# Altium PCB Ahmad_reza_shabani.PcbDoc
Units mm, origin at the board's own origin, x right, y up, seen from the top; angles counter-clockwise.
Board outline 109.35 x 65.66 mm, 2 copper layers (Top Layer, Bottom Layer); 28 components, 24 nets, 118 pads, 25 vias.
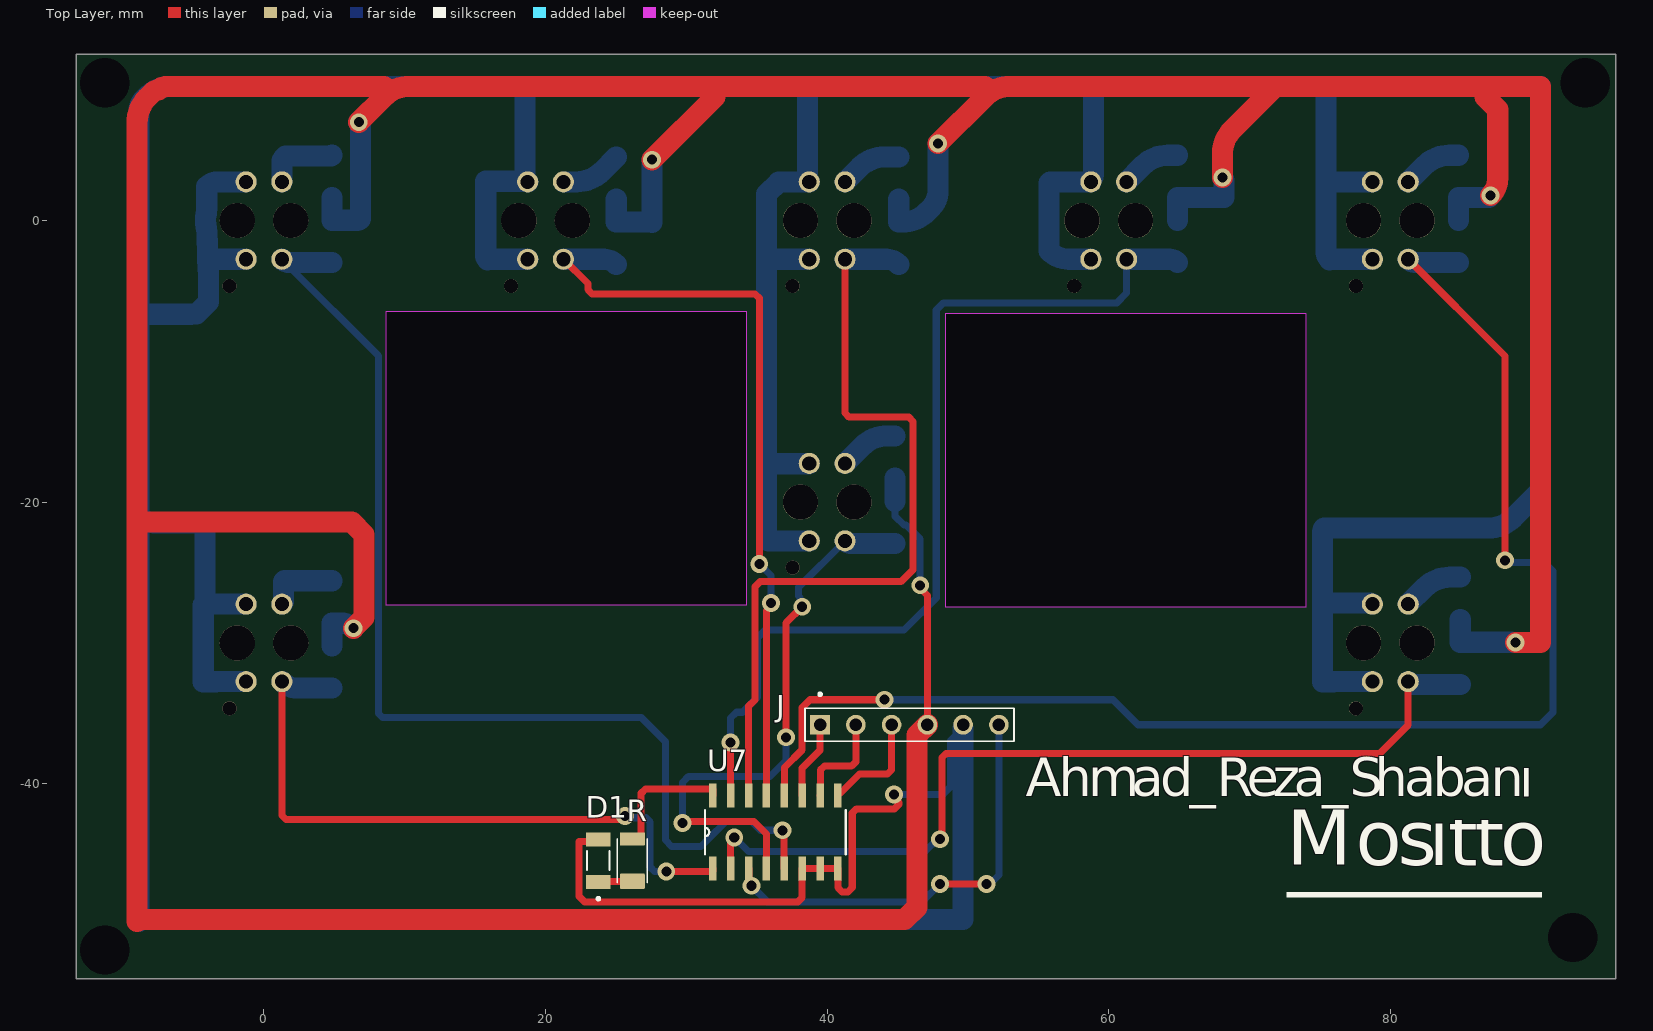
[diagram p0: Top Layer view]
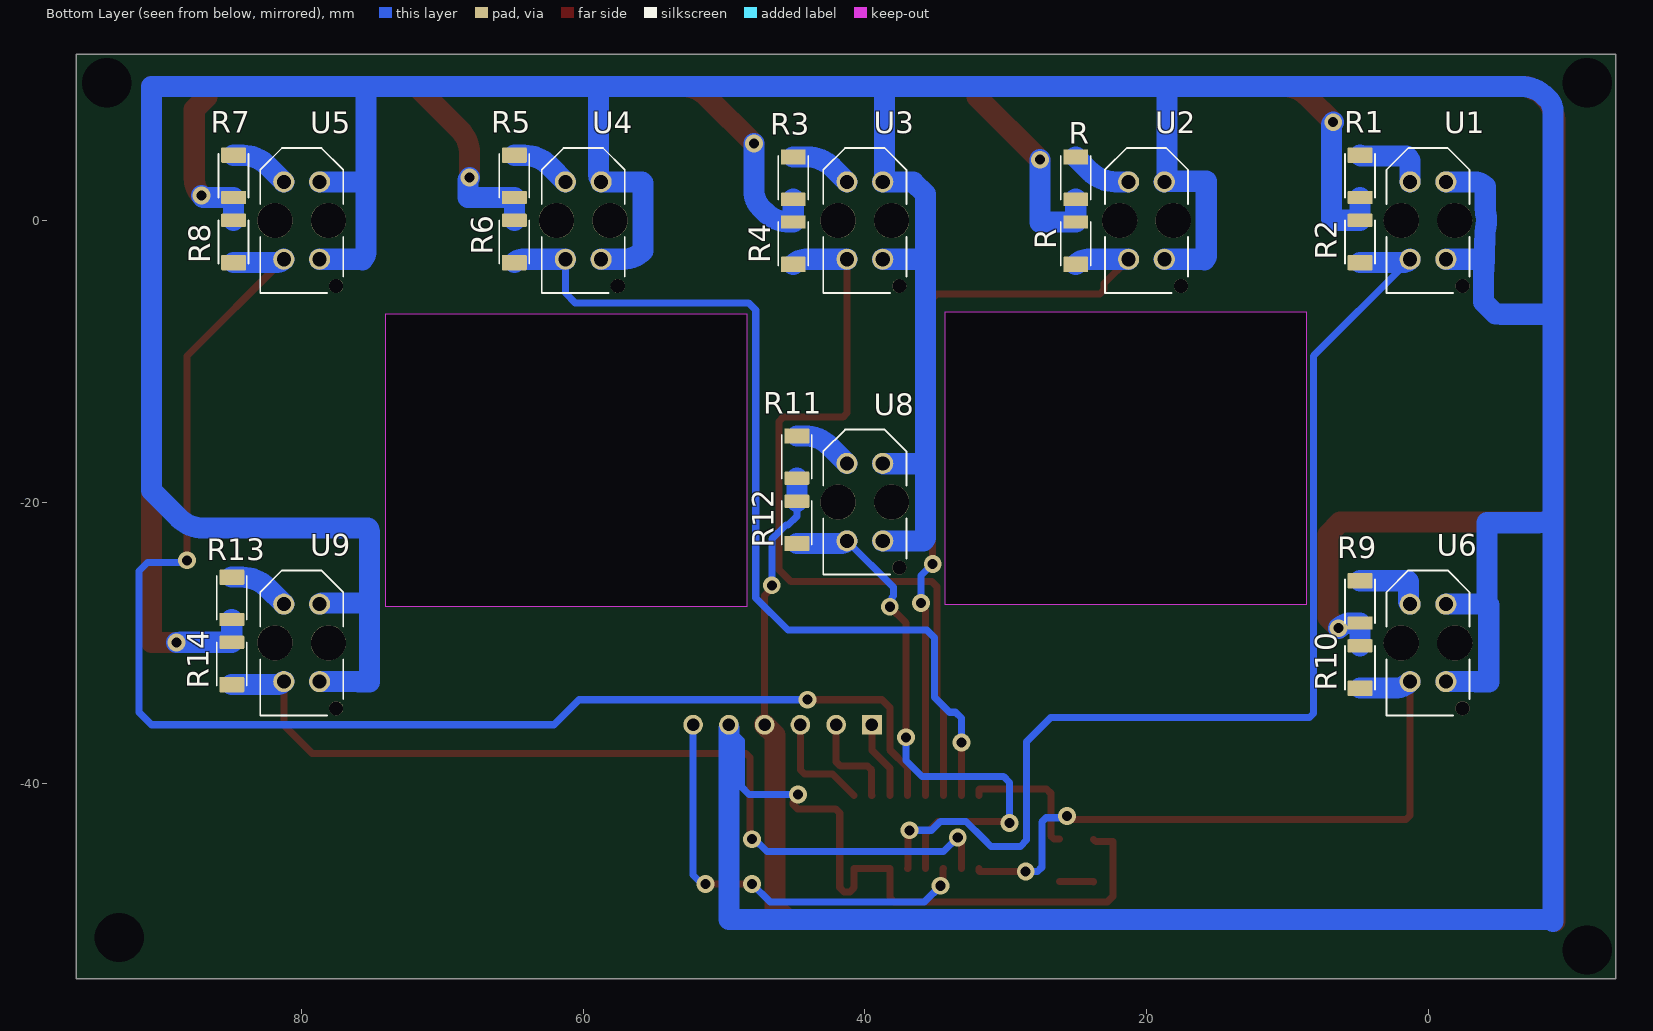
[diagram p1: Bottom Layer view, seen from below]
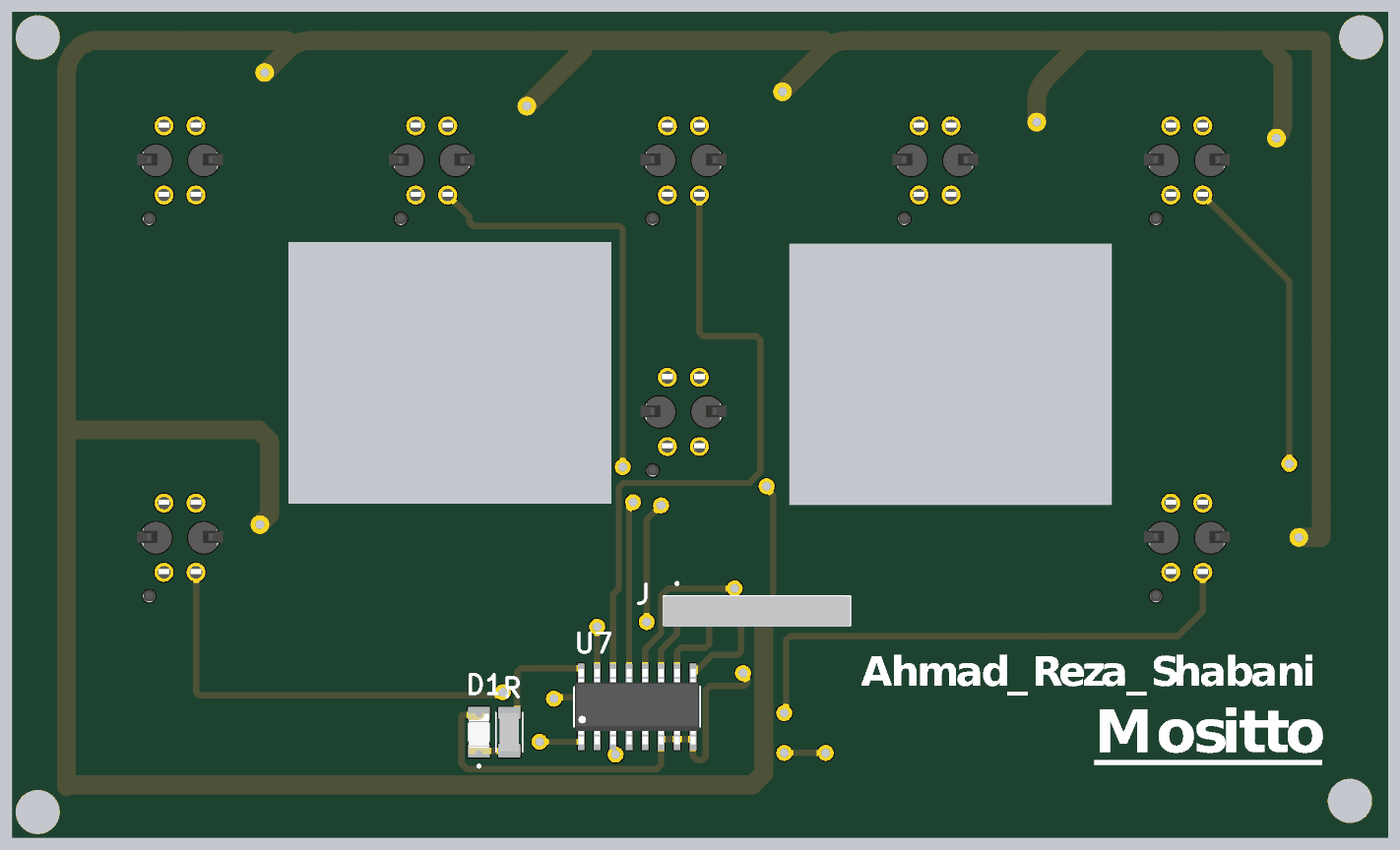
[diagram p2: 3D render of the assembled board from above, using the file's embedded part models]
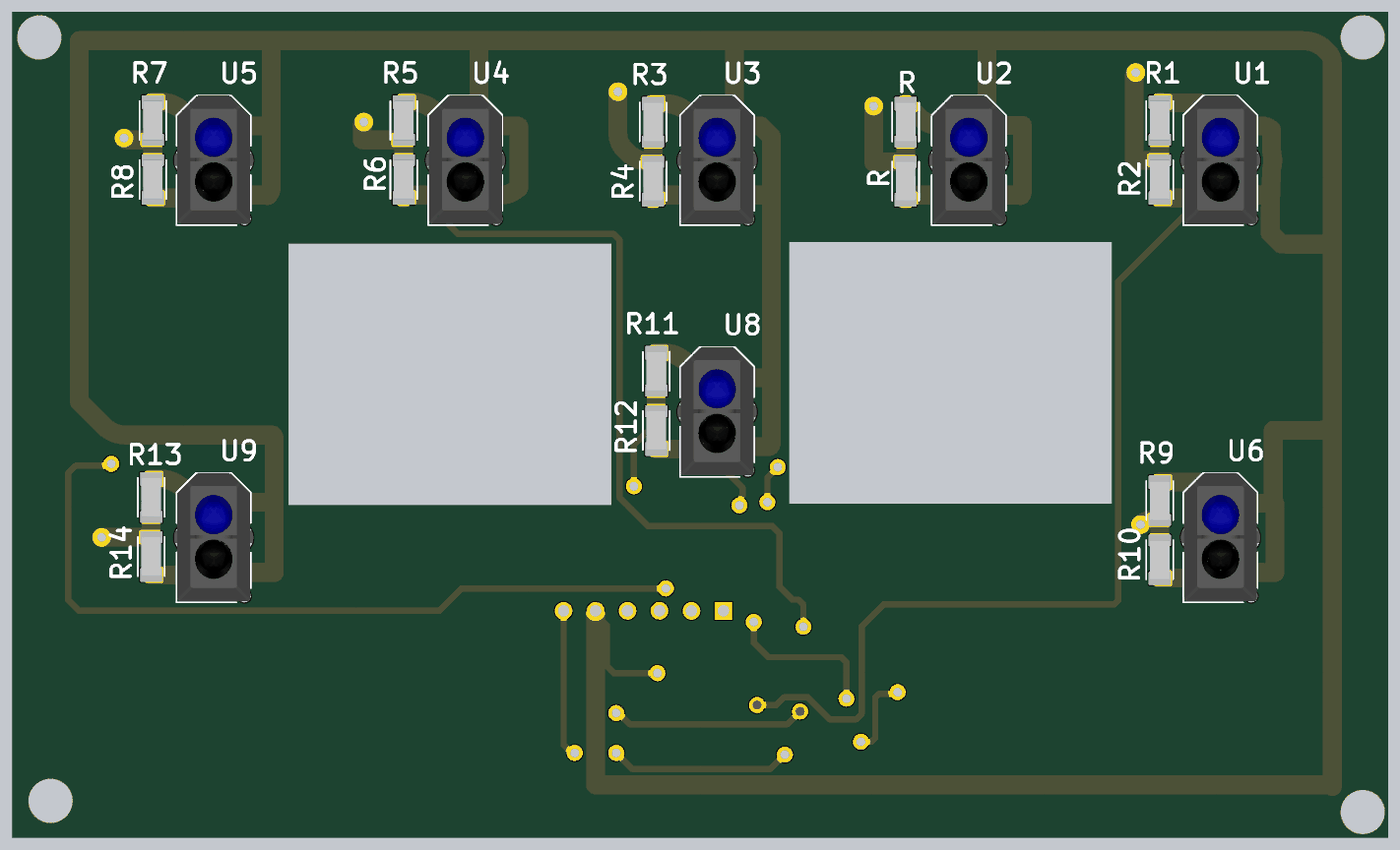
[diagram p3: 3D render of the assembled board from below, using the file's embedded part models]

## Layer stack, top to bottom
Top Solder: solder mask 0.0102, Solder Resist, Dk 3.5
Top Layer: signal copper 0.0356
Dielectric 1: dielectric 0.32, FR-4, Dk 4.8
Bottom Layer: signal copper 0.0356
Bottom Solder: solder mask 0.0102, Solder Resist, Dk 3.5

## Board outline
-13.335,11.811 96.012,11.811 96.012,-53.848 -13.335,-53.848
cut-out: 74.041,-27.432 74.041,-6.604 48.387,-6.604 48.387,-27.432
cut-out: 34.29,-27.305 34.29,-6.477 8.636,-6.477 8.636,-27.305

## Design rules (kind name [scope] priority, off if disabled: settings)
Clearance [All] p1: gap=0.254 ignorepadtopadclearanceinfootprint=FALSE except(0: Arc-Hole Track-Hole SMDPad-Hole THPad-Hole Via-Hole Fill-Hole Poly-Hole Region-Hole Text-Hole)
PolygonConnect [All] p1: connectstyle=Relief reliefconductorwidth=0.254 reliefentries=4 polygonreliefangle="90 Angle" airgapwidth=0.254
RoutingVias [All] p1: holewidth=0.711 width=1.27 viastyle="Through Hole" minholewidth=0.711 minwidth=1.27 maxholewidth=0.711 maxwidth=1.27
SolderMaskExpansion [All] p1: expansion=0.102 istentingtop=FALSE
Width [All] p1: maxlimit=1.5 minlimit=0.5 preferedwidth=1 minimp=50.000000 maximp=50.000000 favimp=50.000000
30 further rules are at their usual default settings.

## Classes and differential pairs
component class Sheet4: D1 J R R1 R2 R3 R4 R5 R6 R7 R8 R9 R10 R11 R12 R13 R14 U1 U2 U3 U4 U5 U6 U7 U8 U9

## Components (designator, comment, footprint, x,y, rotation, side; value= is the part's Value field where it differs from the comment)
D1 "LHN974_RED_LED_1206" LEDC3216X120N 23.749,-45.466 r90 top
J "103321-6" TE_103321-6 45.847,-35.814 r0 top
R "2-1879462-9" RESC3115X65N 25.019,-1.651 r90 bottom
R "2-1879462-9" RESC3115X65N 25.019,3.048 r270 bottom
R "2-1879462-9" RESC3115X65N 26.162,-45.466 r90 top
R1 "2-1879462-9" RESC3115X65N 4.826,3.175 r270 bottom
R2 "2-1879462-9" RESC3115X65N 4.826,-1.524 r90 bottom
R3 "2-1879462-9" RESC3115X65N 45.085,3.048 r270 bottom
R4 "2-1879462-9" RESC3115X65N 45.085,-1.651 r90 bottom
R5 "2-1879462-9" RESC3115X65N 64.897,3.175 r270 bottom
R6 "2-1879462-9" RESC3115X65N 64.897,-1.524 r90 bottom
R7 "2-1879462-9" RESC3115X65N 84.836,3.175 r270 bottom
R8 "2-1879462-9" RESC3115X65N 84.836,-1.524 r90 bottom
R9 "2-1879462-9" RESC3115X65N 4.826,-27.051 r270 bottom
R10 "2-1879462-9" RESC3115X65N 4.826,-31.75 r90 bottom
R11 "2-1879462-9" RESC3115X65N 44.831,-16.764 r270 bottom
R12 "2-1879462-9" RESC3115X65N 44.831,-21.479 r90 bottom
R13 "2-1879462-9" RESC3115X65N 84.963,-26.797 r270 bottom
R14 "2-1879462-9" RESC3115X65N 84.963,-31.496 r90 bottom
U1 "TCRT5000" OPTO_TCRT5000 0,0 r90 bottom
U2 "TCRT5000" OPTO_TCRT5000 20,0 r90 bottom
U3 "TCRT5000" OPTO_TCRT5000 40,0 r90 bottom
U4 "TCRT5000" OPTO_TCRT5000 60,0 r90 bottom
U5 "TCRT5000" OPTO_TCRT5000 80,0 r90 bottom
U6 "TCRT5000" OPTO_TCRT5000 0,-30 r90 bottom
U7 "74HC4051D" SOIC127P600X175-16N 36.322,-43.434 r90 top
U8 "TCRT5000" OPTO_TCRT5000 40,-20 r90 bottom
U9 "TCRT5000" OPTO_TCRT5000 80,-30 r90 bottom

## Footprints (in the part's own frame and the unit in brackets; to place one, negate y for a bottom-side part, rotate by r counter-clockwise, add the part's x,y. Pads: shape width x height; smd on the part's side, far side on the other; paste and mask are expansions set on the pad)
LEDC3216X120N [mm]
  rect 1.01x1.73 smd: NEG(1.51,0) POS(-1.51,0)
  silkscreen extent -2.8,-0.8 0.68,0.8, body extent -1.73,-0.8 1.47,0.8, height 1.2
OPTO_TCRT5000 [mm]
  round 1.5 hole 1: A(2.75,1.27) CATH(2.75,-1.27) COLL(-2.75,1.27) E(-2.75,-1.27)
  round 1 hole 1 unplated: ""(-4.65,-2.45)
  round 2.5 hole 2.5 unplated: ""(0,-1.9) ""(0,1.9)
  silkscreen extent -5.15,-2.95 5.15,2.95, body extent -5.04,-3.4 5.16,3.4, height 7.2
RESC3115X65N [mm]
  rrect14% 1.09x1.77 smd: 1(-1.465,0)
  rrect14% 0.94x1.77 smd: 2(1.54,0)
  silkscreen extent -1.55,-1.06 1.55,1.06, body extent -1.55,-0.77 1.55,0.77, height 0.56
SOIC127P600X175-16N [mil]
  rect 67x21 smd: 1(-102,175) 2(-102,125) 3(-102,75) 4(-102,25) 5(-102,-25) 6(-102,-75) 7(-102,-125) 8(-102,-175) 9(102,-175) 10(102,-125) 11(102,-75) 12(102,-25) 13(102,25) 14(102,75) 15(102,125) 16(102,175)
  silkscreen extent -62,-197 62,197, body extent -118,-195 118,195, height 69
TE_103321-6 [mm]
  rect 1.398x1.398 hole 0.89: 1(-6.35,0)
  round 1.398 hole 0.89: 2(-3.81,0) 3(-1.27,0) 4(1.27,0) 5(3.81,0) 6(6.35,0)
  silkscreen extent -7.42,-1.17 7.42,2.27, body extent -7.42,-1.17 7.42,1.17, height 10.58

## Part data
D1: "2.6 V Red LED SMD", Package=None, Availability="Not in stock", Check_prices=https://www.snapeda.com/parts/LHN974%20RED%20LED%201206/Osram/view-part/7899607/?ref=eda, MF=Osram, MP="LHN974 RED LED 1206", Price=None, SnapEDA_Link=https://www.snapeda.com/parts/LHN974%20RED%20LED%201206/Osram/view-part/7899607/?ref=snap
J: "Pin 06 MODII HDR SRST B / A .100CL 6 POS", Package=None, Availability=Unavailable, MF="TE Connectivity", Mouser-Purchase-URL=https://snapeda.com/shop?store=Mouser&id=4238467, MP=103321-6, Price=None, SnapEDA_Link=https://www.snapeda.com/parts/103321-6/TE%20Connectivity/view-part/4238467/?ref=snap
R R R R1 R2 R3 R4 R5 R6 R7 R8 R9 R10 R11 R12 R13 R14: "RES 0.24 OHM 1% 1/4W 1206", Package=1206, Power_Rating=".25 W", Resistance=24, Tolerance=1%, Availability=Unavailable, EU_RoHS_Compliance="Compliant with Exemptions", MF="TE Connectivity", MP=2-1879462-9, Price=None, SnapEDA_Link=https://www.snapeda.com/parts/2-1879462-9/TE%20Connectivity/view-part/2213899/?ref=snap
U1 U2 U3 U4 U5 U6 U8 U9: "950 nm 60 mA Through Hole Reflective Optical Sensor with Transistor Output", Package=None, Availability=Unavailable, MP=TCRT5000, Price=None
U7: "1 Circuit IC Switch 8:1 130Ohm 16-SOIC", Package="SOIC-16 Toshiba", Availability="In Stock", Check_prices=https://www.snapeda.com/parts/74HC4051D/Toshiba/view-part/?ref=eda, MF=Toshiba, MP=74HC4051D, Price=None, Purchase-URL=https://pricing.snapeda.com/search/part/74HC4051D/?ref=eda, SnapEDA_Link=https://www.snapeda.com/parts/74HC4051D/Toshiba/view-part/?ref=snap

## Free pads (board coordinates)
  round 1.524 hole 3.5: 5(-11.303,-51.816) 5(-11.303,9.779) 5(92.964,-50.927) 5(93.853,9.779)

## Via types
v1: diameter 1.27, hole 0.711, Top Layer to Bottom Layer, 25 vias

## Nets (pads, with @x,y where several pads share a name; then routed paths per layer and width w, separated by ;. In a path a pad name is that pad's centre, name@x,y a point inside that pad or via, vN(x,y) a via of type N, cw(c..) or ccw(c..) an arc to the next point about the centre after c; other vN are vias at no path point)
+5: J.4 R1.2 R2.2 R3.2 R4.2 R5.2 R6.2 R7.2 R8.2 R9.2 R10.2 R11.2 R12.2 R13.2 R14.2 R.2@25.019,1.508 R.2@25.019,-0.111 | length 386.9
  Top Layer w0.5: v1(46.609,-25.908) 46.609,-26.116 47.117,-26.624 J.4
  Top Layer w1.5: v1(6.35,-28.956) 7.112,-28.194 7.112,-22.296 6.233,-21.418 -9.017,-21.418 ; v1(6.731,6.985) 8.527,8.781 cw(c10.323,6.985) 10.323,9.525 32.022,9.525 33.818,9.525 51.199,9.525 ; 8.527,9.525 -6.88,9.525 ccw(c-6.88,8.658) -7.493,9.271 ccw(c-7.493,8.658) -7.927,9.091 -8.273,8.745 ccw(c-6.477,6.949) -9.017,6.949 -9.017,-21.418 ; v1(27.559,4.318) 32.022,8.781 ; J.4 46.379,-36.552 46.379,-48.778 45.5,-49.657 -8.71,-49.657 ccw(c-8.71,-50.091) -9.017,-49.784 -9.017,-49.657 -9.017,-21.418 ; v1(47.879,5.461) 51.199,8.781 cw(c52.995,6.985) 52.995,9.525 71.837,9.525 ; v1(68.072,3.048) 68.072,4.708 cw(c70.612,4.708) 68.816,6.504 71.837,9.525 ; 86.723,8.781 87.63,7.874 87.63,3.004 cw(c85.896,3.004) v1(87.122,1.778) ; v1(88.9,-29.972) 90.678,-29.972 90.678,9.525 86.723,9.525 84.927,9.525 71.837,9.525
  Bottom Layer w0.5: R12.2 44.831,-21.006 45.445,-21.62 45.606,-21.62 46.609,-22.624 v1(46.609,-25.908)
  Bottom Layer w1.5: R10.2 R9.2 5.469,-28.591 cw(c5.469,-29.837) v1(6.35,-28.956) ; R1.2 R2.2 6.59,0.016 ccw(c6.59,0.395) 6.858,0.127 6.858,6.678 ccw(c6.424,6.678) v1(6.731,6.985) ; R.2@25.019,1.508 25.019,-0.111 27.52,-0.111 cw(c27.52,-0.166) 27.559,-0.127 v1(27.559,4.318) ; R12.2 R11.2 ; R3.2 R4.2 45.319,-0.111 ccw(c45.319,2.429) 47.115,0.633 47.371,0.889 ccw(c46.145,2.115) 47.879,2.115 v1(47.879,5.461) ; R6.2 R5.2 68.16,1.635 ccw(c68.16,1.69) 68.199,1.651 68.199,2.741 ccw(c67.765,2.741) v1(68.072,3.048) ; R8.2 R7.2 86.956,1.635 ccw(c86.956,1.69) 86.995,1.651 v1(87.122,1.778) ; R13.2 R14.2 88.607,-29.956 cw(c88.607,-30.011) 88.646,-29.972 v1(88.9,-29.972)
"Analog _A0": R.1@25.019,-3.116 U2.COLL U7.13 | length 55
  Top Layer w0.5: U2.COLL 23.006,-4.486 23.006,-4.914 23.299,-5.207 34.886,-5.207 35.179,-5.5 v1(35.179,-24.384) ; U7.13 35.687,-27.703 36.003,-27.386 v1(36.003,-27.178)
  Bottom Layer w0.5: v1(35.179,-24.384) 36.003,-25.208 v1(36.003,-27.178)
  Bottom Layer w1.5: U2.COLL 24.135,-2.75 cw(c24.135,-4) R.1@25.019,-3.116
"Analog _A1": R4.1 U3.COLL U7.14 | length 57.2
  Top Layer w0.5: U7.14 34.417,-34.495 34.864,-34.047 34.864,-26.008 35.218,-25.654 45.252,-25.654 46.101,-24.805 46.101,-14.263 45.808,-13.97 41.563,-13.97 41.27,-13.677 U3.COLL
  Bottom Layer w1.5: U3.COLL 44.201,-2.75 cw(c44.201,-4) R4.1
"Analog _A2": R6.1 U4.COLL U7.15 | length 66.7
  Top Layer w0.5: U7.15 v1(33.147,-37.084)
  Bottom Layer w0.5: v1(33.147,-37.084) 33.147,-35.345 33.567,-34.925 33.987,-34.925 35.049,-33.863 35.049,-29.633 35.599,-29.083 45.466,-29.083 47.748,-26.801 47.748,-6.354 48.26,-5.842 60.579,-5.842 61.27,-5.151 U4.COLL
  Bottom Layer w1.5: U4.COLL 64.32,-2.75 cw(c64.32,-3.566) R6.1
"Analog _A3": R8.1 U5.COLL U7.12 | length 103.1
  Top Layer w0.5: U7.12 36.957,-38.862 38.227,-37.592 38.227,-34.583 38.774,-34.036 v1(44.069,-34.036) ; U5.COLL 88.138,-9.618 v1(88.138,-24.13)
  Bottom Layer w0.5: v1(44.069,-34.036) 60.313,-34.036 62.091,-35.814 90.678,-35.814 91.567,-34.925 91.567,-24.892 90.952,-24.277 88.285,-24.277 v1(88.138,-24.13)
  Bottom Layer w1.5: U5.COLL ccw(c81.847,-2.173) 81.847,-2.989 R8.1
"Analog _A4": R10.1 U6.COLL U7.1 | length 47.7
  Top Layer w0.5: U6.COLL 1.27,-42.252 1.563,-42.545 25.192,-42.545 25.446,-42.291 v1(25.654,-42.291) ; v1(28.575,-46.228) 31.86,-46.228 31.877,-46.211 U7.1
  Bottom Layer w0.5: v1(25.654,-42.291) 25.781,-42.418 27.139,-42.418 27.432,-42.711 27.432,-45.935 27.725,-46.228 v1(28.575,-46.228)
  Bottom Layer w1.5: U6.COLL ccw(c2.393,-31.627) 2.393,-33.215 R10.1
"Analog _A5": R2.1 U1.COLL U7.5 | length 79.2
  Top Layer w0.5: v1(36.83,-43.307) 36.94,-43.417 36.94,-46.008 U7.5
  Bottom Layer w0.5: U1.COLL 1.678,-3.158 8.128,-9.608 8.128,-35.013 8.421,-35.306 26.797,-35.306 28.512,-37.021 28.512,-44.006 28.956,-44.45 31.028,-44.45 31.566,-43.912 32.802,-42.676 34.64,-42.676 35.271,-43.307 v1(36.83,-43.307)
  Bottom Layer w1.5: U1.COLL ccw(c1.847,-2.173) 1.847,-2.989 R2.1
"Analog _A6": R14.1 U7.2 U9.COLL | length 64.5
  Top Layer w0.5: U7.2 33.147,-44.277 33.401,-44.023 v1(33.401,-43.815) ; v1(48.018,-43.942) 48.165,-43.795 48.165,-38.139 48.458,-37.846 79.248,-37.846 81.27,-35.824 U9.COLL
  Bottom Layer w0.5: v1(33.401,-43.815) 34.413,-44.827 46.944,-44.827 47.829,-43.942 v1(48.018,-43.942)
  Bottom Layer w1.5: U9.COLL ccw(c81.779,-32.241) 81.779,-32.961 R14.1
"Analog _A7": R12.1 U7.4 U8.COLL | length 40.9
  Top Layer w0.5: v1(29.718,-42.799) 29.841,-42.676 34.802,-42.676 35.687,-43.561 U7.4 ; v1(37.088,-36.703) 37.088,-28.571 v1(38.227,-27.432)
  Bottom Layer w0.5: v1(29.718,-42.799) 29.718,-39.917 30.138,-39.497 35.941,-39.497 37.088,-38.35 v1(37.088,-36.703) ; v1(38.227,-27.432) 38.08,-27.285 38.08,-26.777 37.973,-26.67 37.973,-26.047 U8.COLL
  Bottom Layer w1.5: U8.COLL ccw(c41.738,-22.282) 41.738,-22.944 R12.1
GND: D1.NEG J.5 U1.CATH U1.E U2.CATH U2.E U3.CATH U3.E U4.CATH U4.E U5.CATH U5.E U6.CATH U6.E U7.6 U7.7 U7.8 U8.CATH U8.E U9.CATH U9.E | length 480.6
  Top Layer w0.5: D1.NEG 23.597,-44.108 22.38,-44.108 22.38,-47.995 22.772,-48.387 37.934,-48.387 38.227,-48.094 U7.6 U7.7 U7.8 40.767,-47.387 41.06,-47.68 41.474,-47.68 41.783,-47.371 41.783,-42.076 42.076,-41.783 44.792,-41.783 45.085,-41.49 45.085,-41.32 44.74,-40.975 v1(44.74,-40.767)
  Bottom Layer w0.5: v1(44.74,-40.767) 48.221,-40.767 48.778,-40.21 48.778,-36.936 49.657,-36.057 J.5
  Bottom Layer w1.5: -3.954,-4.027 -3.954,-5.78 -4.804,-6.63 cw(c-5.197,-3.972) -5.193,-6.659 -8.89,-6.659 ; -3.953,-4.026 -3.953,-3.956 -3.954,-3.932 ; -3.954,-3.931 -3.993,-2.754 -3.995,-2.718 ; U6.E -3.39,-32.75 ccw(c-3.39,-32.805) -3.429,-32.766 -4.318,-32.766 -4.318,-27.305 cw(c-4.185,-27.438) -4.185,-27.25 ; U6.CATH -4.185,-27.25 ; U1.E -3.864,-2.75 cw(c-3.864,-2.467) -3.995,-2.718 ; U1.CATH -3.25,2.75 ccw(c-3.25,1.599) -4.064,2.413 -4.064,0.814 cw(c-5.564,0.817) -4.099,0.493 ccw(c-1.9,0) -4.109,0.45 ccw(c-1.9,0) -4.099,-0.493 ccw(c-1.9,0) -4.096,-0.508 cw(c-5.558,-0.845) -4.058,-0.797 -3.995,-2.718 ; U2.E 15.981,-2.75 ccw(c15.981,-2.9) 15.875,-2.794 cw(c16.182,-2.487) 15.748,-2.487 15.748,2.794 18.624,2.794 cw(c18.624,2.644) U2.CATH cw(c19.184,3.204) 18.542,3.204 18.542,9.525 ; U8.E 35.855,-22.75 cw(c35.855,-22.692) 35.814,-22.733 cw(c36.121,-22.426) 35.687,-22.426 35.687,-17.272 ; U8.CATH cw(c38.677,-17.197) 38.677,-17.272 35.687,-17.272 ; U3.E 35.973,-2.75 ccw(c36.663,-3.44) 35.687,-3.44 ; J.5@49.657,-36.057 49.657,-49.657 -8.583,-49.657 ccw(c-8.583,-50.091) -8.89,-49.784 -8.89,-21.034 ; U4.E 57.18,-2.75 cw(c57.18,-0.732) 55.753,-2.159 55.753,2.667 cw(c55.953,2.467) 55.953,2.75 U4.CATH 58.928,3.228 58.928,5.783 ; 58.928,5.933 58.928,9.525 ; 75.438,9.144 75.438,2.794 ; U9.E 75.985,-32.75 ccw(c75.985,-32.805) 75.946,-32.766 75.184,-32.766 75.184,-27.178 ; U9.CATH ccw(c78.556,-27.424) 78.556,-27.178 75.184,-27.178 ; U5.E 75.798,-2.75 ccw(c75.798,-2.9) 75.692,-2.794 cw(c76.305,-2.181) 75.438,-2.181 75.438,2.794 ; U5.CATH 75.544,2.75 cw(c75.544,2.9) 75.438,2.794 ; -8.89,-21.034 ccw(c-7.854,-19.998) -7.854,-21.463 -4.191,-21.463 -4.185,-21.469 -4.185,-27.25 ; -8.89,-21.034 -8.89,-6.659 ; -8.89,-6.659 -8.89,7.716 cw(c-7.589,7.716) -8.509,8.636 -8.364,8.781 cw(c-6.568,6.985) -6.568,9.525 18.542,9.525 ; 18.542,9.525 38.608,9.525 ; 35.687,-17.272 35.687,-3.44 ; 35.687,-3.44 35.687,1.871 36.566,2.75 U3.CATH cw(c39.025,3.045) 38.608,3.045 38.608,9.525 ; 38.608,9.525 58.928,9.525 ; 58.928,9.525 90.678,9.525 90.678,-19.177 88.755,-21.1 cw(c86.959,-19.304) 86.959,-21.844 75.311,-21.844 ccw(c75.618,-22.151) 75.184,-22.151 75.184,-27.178
NetD1_POS: D1.POS R.1@26.162,-46.931 | length 2.4
  Top Layer w0.5: D1.POS 23.771,-46.954 26.14,-46.954 R.1@26.162,-46.931
NetR1_1: R1.1 U1.A | length 5.2
  Bottom Layer w1.5: U1.A 1.27,4.064 cw(c1.883,4.064) 1.45,4.498 1.524,4.572 4.662,4.572 ccw(c4.662,4.804) R1.1
NetR3_1: R3.1 U3.A | length 4.4
  Bottom Layer w1.5: U3.A 42.289,3.769 cw(c44.085,1.973) 44.085,4.513 R3.1
NetR5_1: R5.1 U4.A | length 4.3
  Bottom Layer w1.5: U4.A 62.416,3.896 cw(c64.212,2.1) 64.212,4.64 R5.1
NetR7_1: R7.1 U5.A | length 4.2
  Bottom Layer w1.5: U5.A 82.416,3.896 cw(c84.212,2.1) 84.212,4.64 R7.1
NetR9_1: R9.1 U6.A | length 5.1
  Bottom Layer w1.5: U6.A ccw(c0.963,-26.943) 1.397,-26.943 1.397,-25.654 1.465,-25.586 R9.1
NetR11_1: R11.1 U8.A | length 4.3
  Bottom Layer w1.5: U8.A 42.477,-16.043 cw(c44.273,-17.839) 44.273,-15.299 R11.1
NetR13_1: R13.1 U9.A | length 4.4
  Bottom Layer w1.5: U9.A 82.444,-26.076 cw(c84.24,-27.872) 84.24,-25.332 R13.1
NetR_1: R.1@25.019,4.513 U2.A | length 4.4
  Bottom Layer w1.5: U2.A 22.204,2.75 ccw(c22.204,5.29) 24,3.494 R.1@25.019,4.513
NetR_2: R.2@26.162,-43.926 U7.16 | length 9.4
  Top Layer w0.5: R.2@26.162,-43.926 26.573,-43.926 26.793,-43.706 26.793,-40.679 27.086,-40.386 31.86,-40.386 31.877,-40.403 U7.16
out: J.6 U7.3 | length 30.9
  Top Layer w0.5: U7.3@34.4,-46.025 U7.3@34.434,-46.058 ; U7.3 34.434,-46.042 U7.3@34.434,-46.058 ; v1(34.613,-47.248) 34.613,-47.04 34.434,-46.86 U7.3@34.434,-46.058 ; v1(48.018,-47.117) v1(51.308,-47.117)
  Bottom Layer w0.5: v1(34.613,-47.248) 35.752,-48.387 46.748,-48.387 v1(48.018,-47.117) ; v1(51.308,-47.117) 51.562,-47.117 52.197,-46.482 J.6
S0: J.1 U7.11 | length 5.6
  Top Layer w0.5: U7.11 38.227,-38.896 39.497,-37.626 J.1
S1: J.2 U7.10 | length 7.2
  Top Layer w0.5: U7.10 39.514,-40.826 39.514,-39.028 39.807,-38.735 41.744,-38.735 42.037,-38.442 J.2
S2: J.3 U7.9 | length 7.8
  Top Layer w0.5: U7.9 42.291,-39.319 44.284,-39.319 44.577,-39.026 J.3
pads on no net: U1. U2. U3. U4. U5. U6. U8. U9.

## Silkscreen, mask and mechanical layers (free items; w line width, h text height)
Top Overlay:
  region: 72.642,-47.693 90.765,-47.693 90.765,-48.074 72.642,-48.074
  text "A" at 54.09,-41.779 h4.64
  text "h" at 56.465,-41.779 h4.64
  text "m" at 58.54,-41.779 h4.64
  text "a" at 61.631,-41.781 h4.64
  text "d" at 63.663,-41.781 h4.64
  text "_" at 65.738,-41.784 h4.64
  text "R" at 67.686,-41.779 h4.64
  text "e" at 69.803,-41.781 h4.64
  text "z" at 71.666,-41.783 h4.64
  text "a" at 73.148,-41.781 h4.64
  text "_" at 75.181,-41.784 h4.64
  text "S" at 77.128,-41.781 h4.64
  text "h" at 78.907,-41.779 h4.64
  text "a" at 80.982,-41.781 h4.64
  text "b" at 83.015,-41.781 h4.64
  text "a" at 85.047,-41.781 h4.64
  text "n" at 87.122,-41.779 h4.64
  text "i" at 89.154,-41.779 h4.64
  text "M" at 72.642,-47.053 h6.69
  text "i" at 82.72,-47.053 h6.69
  text "o" at 77.554,-47.055 h6.69
  text "s" at 80.518,-47.055 h6.69
  text "t" at 84.117,-47.055 h6.69
  text "t" at 85.98,-47.055 h6.69
  text "o" at 87.801,-47.055 h6.69